# Altium PCB MAIN.PcbDoc
Units mil, origin at the board's own origin, x right, y up, seen from the top; angles counter-clockwise.
Board outline 3745 x 3010 mil, 2 copper layers (Top Layer, Bottom Layer); 47 components, 29 nets, 159 pads, 5 vias.
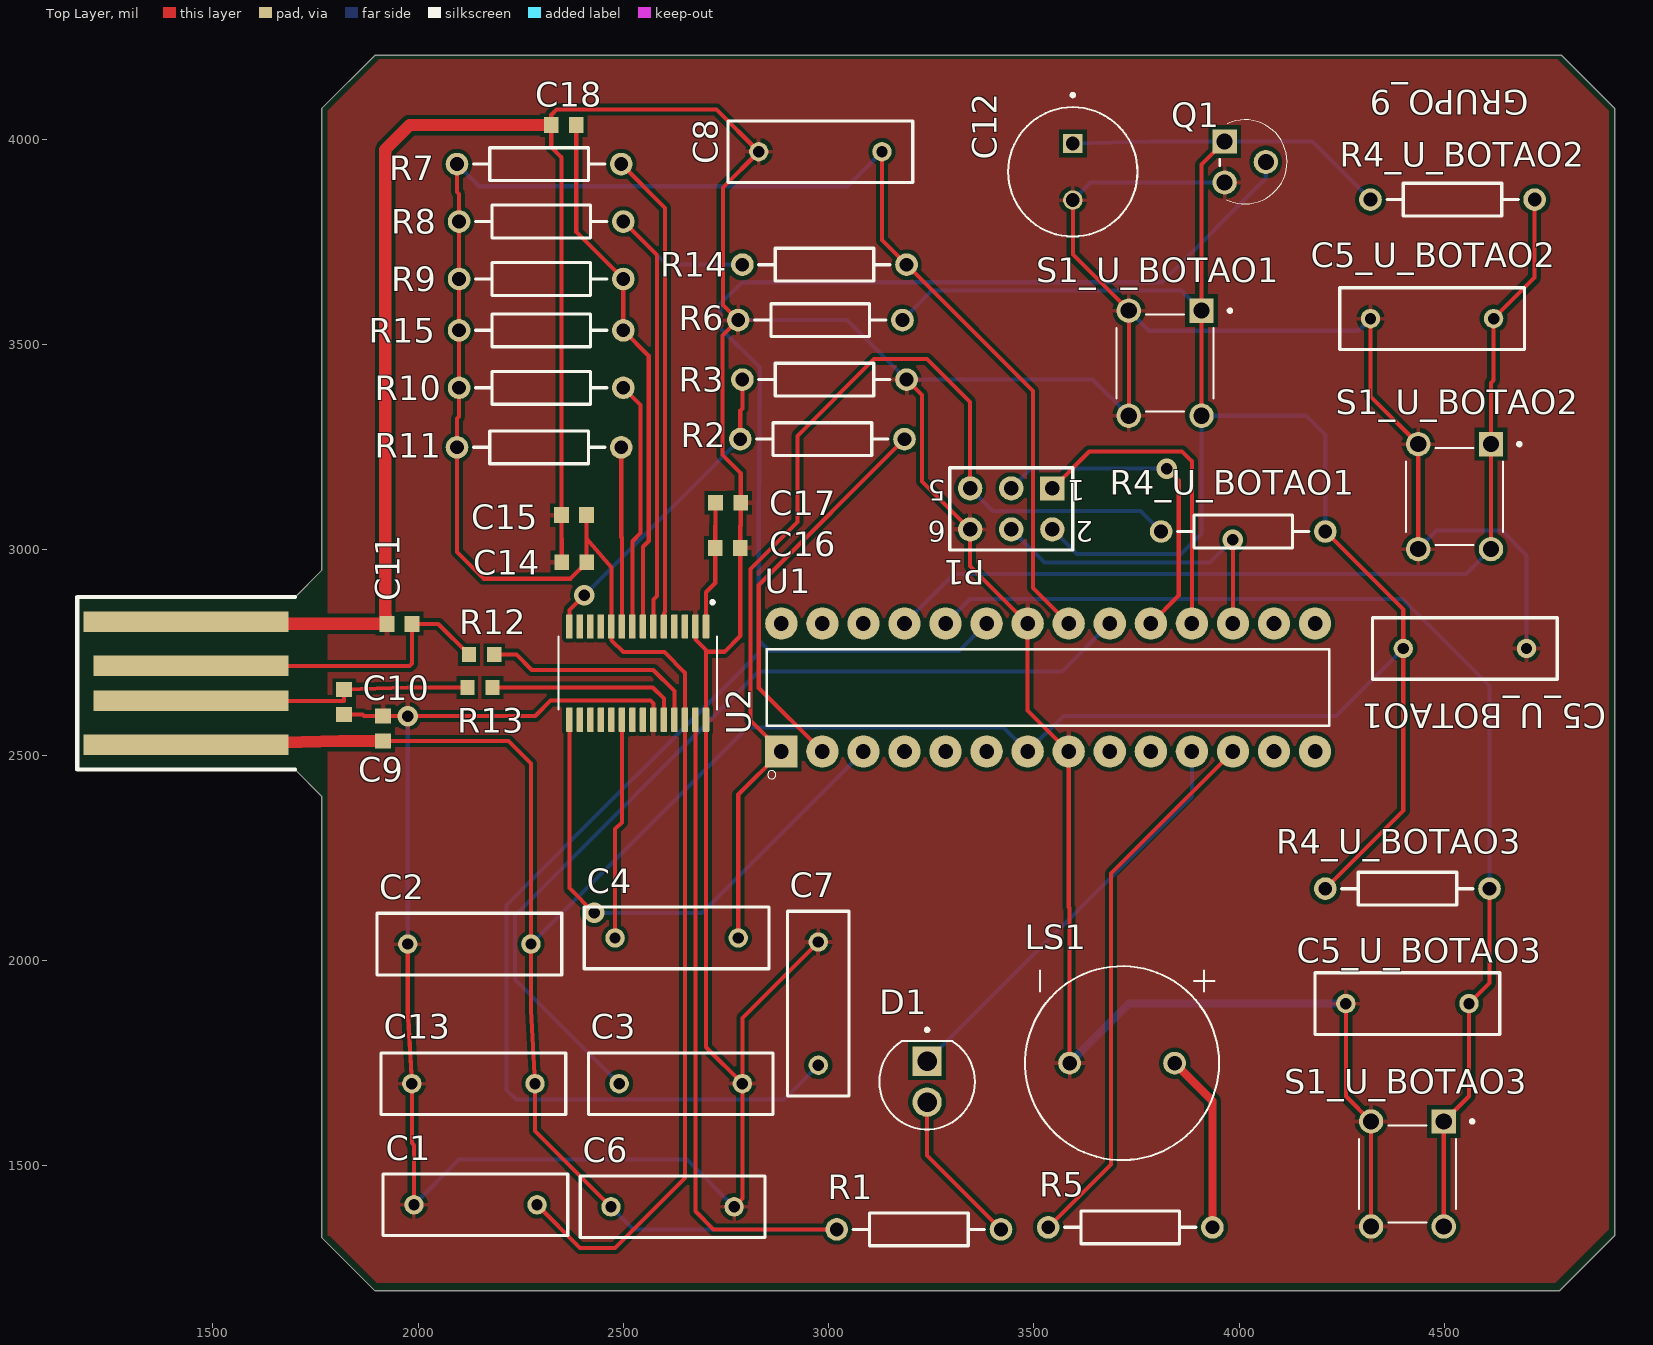
[diagram p0: Top Layer view]
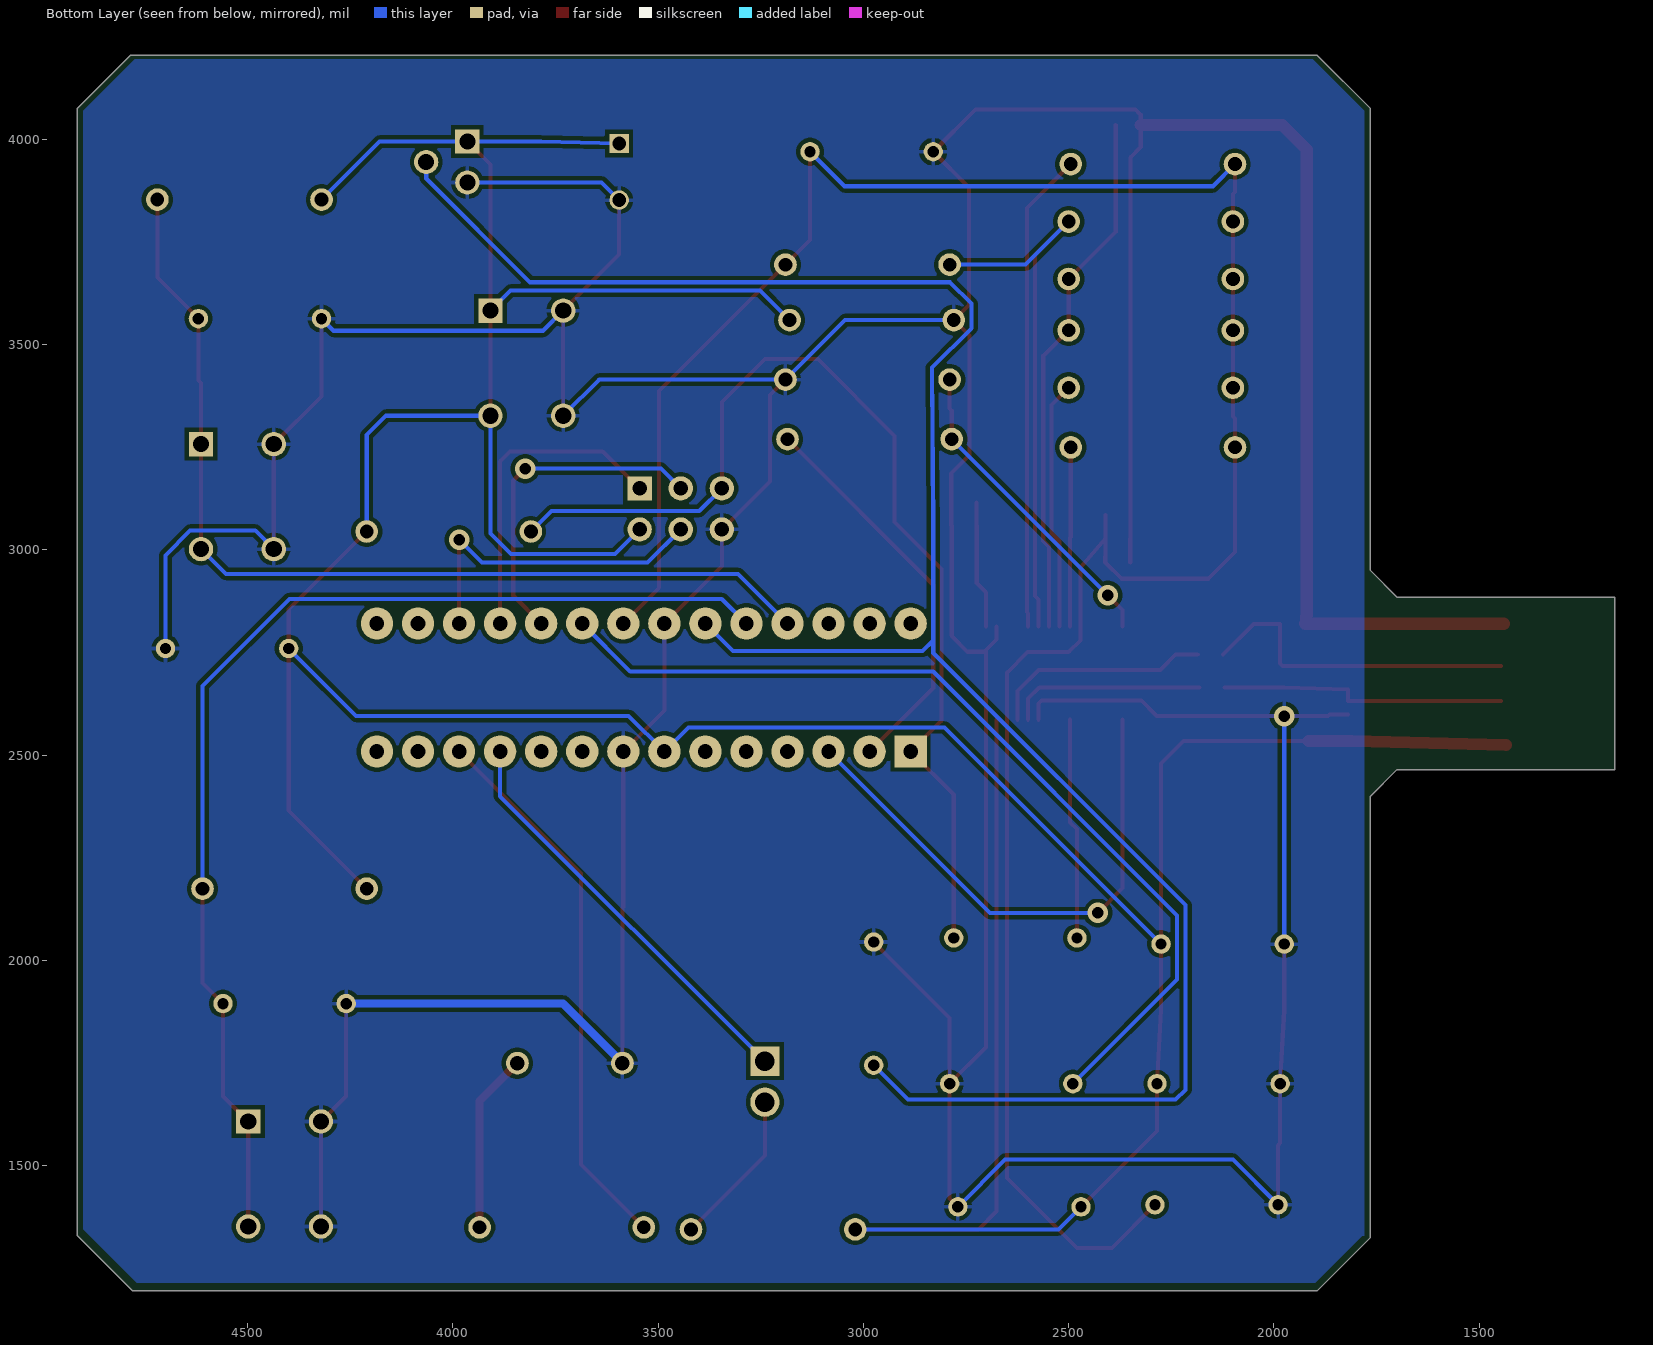
[diagram p1: Bottom Layer view, seen from below]

## Layer stack, top to bottom
Top Solder: solder mask 0.4, Solder Resist, Dk 3.5
Top Layer: signal copper 1.4
Dielectric 1: dielectric 12.6, FR-4, Dk 4.8
Bottom Layer: signal copper 1.4
Bottom Solder: solder mask 0.4, Solder Resist, Dk 3.5

## Board outline
1170,2465 1170,2885 1700,2885 1765,2950 1765,4075 1895,4205 4785,4205 4915,4075 4915,1330 4780,1195 1895,1195 1765,1325 1765,2400 1700,2465

## Design rules (kind name [scope] priority, off if disabled: settings)
Clearance [All] p1: gap=10 ignorepadtopadclearanceinfootprint=TRUE
PolygonConnect [All] p1: connectstyle=Relief reliefconductorwidth=10 reliefentries=4 polygonreliefangle="90 Angle" airgapwidth=10
RoutingVias [All] p1: holewidth=28 width=50 viastyle="Through Hole" minholewidth=28 minwidth=50 maxholewidth=28 maxwidth=50
SolderMaskExpansion [All] p1: expansion=4 istentingtop=FALSE
SupplyNets "Schematic Supply Nets_3" [InNet('VBUS_DET')] p1: voltage=0.000
SupplyNets "Schematic Supply Nets_2" [InNet('VDD_3V8')] p2: voltage=0.000
SupplyNets "Schematic Supply Nets_1" [InNet('VCC')] p3: voltage=0.000
SupplyNets "Schematic Supply Nets" [InNet('VCCIO')] p4: voltage=0.000
Width [All] p1 off: maxlimit=10 minlimit=10 preferedwidth=10
30 further rules are at their usual default settings.

## Classes and differential pairs
channel class BOTAO: U_BOTAO1 U_BOTAO2 U_BOTAO3
component class U_USB_SERIE: C8 C9 C10 C11 C12 C13 C14 C15 C16 C17 C18 R6 R7 R8 R9 R10 R11 R12 R13 R14 R15 U2
component class U_SENSOR: C6 C7 Q1
component class U_LED: D1 R1
component class U_BUZZER: LS1 R5
component class U_BOTAO3: C5_U_BOTAO3 R4_U_BOTAO3 S1_U_BOTAO3
component class U_BOTAO2: C5_U_BOTAO2 R4_U_BOTAO2 S1_U_BOTAO2
component class U_BOTAO1: C5_U_BOTAO1 R4_U_BOTAO1 S1_U_BOTAO1
component class U_ATMEGA328P: C1 C2 C3 C4 P1 U1
component class MAIN: R2 R3

## Components (designator, comment, footprint, x,y, rotation, side; value= is the part's Value field where it differs from the comment)
C1 "100nF" RAD-0.3 2140,1405 r0 top value=100pF
C2 "100nF" RAD-0.3 2125,2040 r0 top value=100pF
C3 "100nF" RAD-0.3 2640,1700 r180 top value=100pF
C4 "100nF" RAD-0.3 2630,2055 r0 top value=100pF
C5_U_BOTAO1 "100nF" RAD-0.3 4550,2760 r180 top value=100pF (schematic designator C5)
C5_U_BOTAO2 "100nF" RAD-0.3 4470,3563.46 r0 top value=100pF (schematic designator C5)
C5_U_BOTAO3 "100nF" RAD-0.3 4410,1895 r0 top value=100pF (schematic designator C5)
C6 "100nF" RAD-0.3 2620,1400 r0 top value=100pF
C7 "100nF" RAD-0.3 2975,1895 r90 top value=100pF
C8 "4.7uF" RAD-0.3 2980,3970 r0 top value=100pF
C9 "100uF" CAPC1608X90N 1915,2565 r270 top
C10 "100uF" CAPC1608X90N 1820,2629.49 r90 top
C11 "100uF" CAPC1608X90N 1955,2820 r0 top
C12 "ECA1HM101" CAPPRD350W60D800H1150 3595,3921.1 r270 top
C13 "100nF" RAD-0.3 2135,1700 r0 top value=100pF
C14 "4.7uF" CAPC1608X94N 2380.51,2970 r0 top
C15 "100uF" CAPC1608X90N 2380,3085 r0 top
C16 "4.7uF" CAPC1608X94N 2754.49,3005 r180 top
C17 "100uF" CAPC1608X90N 2755.51,3115 r180 top
C18 "4.7uF" CAPC1608X94N 2355,4035 r0 top
D1 "L08R5000Q1" LEDRD254W57D500H1070 3240,1705 r270 top
LS1 "AT-1224-TWT-5V-2-R" XDCR_AT-1224-TWT-5V-2-R 3715,1750 r270 top
P1 "Header 3X2" HDR2X3 3545,3150 r180 top
Q1 "MCP9701-E/TO" TO127P254X533-3 4065,3895 r270 top
R1 "220R" AXIAL-0.4 3220,1345 r180 top value=1K
R2 "51.5K" AXIAL-0.4 2985,3270 r0 top value=1K
R3 "100K" AXIAL-0.4 2990,3415 r180 top value=1K
R4_U_BOTAO1 "22K" AXIAL-0.4 4010,3045 r180 top value=1K (schematic designator R4)
R4_U_BOTAO2 "22K" AXIAL-0.4 4520,3853.46 r180 top value=1K (schematic designator R4)
R4_U_BOTAO3 "22K" AXIAL-0.4 4410,2175 r180 top value=1K (schematic designator R4)
R5 "10R" AXIAL-0.4 3735,1350 r180 top value=1K
R6 "5K" AXIAL-0.4 2980,3560 r180 top value=1K
R7 "10K" AXIAL-0.4 2295,3940 r0 top value=1K
R8 "10K" AXIAL-0.4 2300,3800 r0 top value=1K
R9 "4.7K" AXIAL-0.4 2300,3660 r0 top value=1K
R10 "10K" AXIAL-0.4 2300,3395 r0 top value=1K
R11 "10K" AXIAL-0.4 2295,3250 r0 top value=1K
R12 "CRGCQ0603J33R" RESC1608X55N 2155,2745 r180 top
R13 "CRGCQ0603J33R" RESC1608X55N 2150.71,2665 r180 top
R14 "10K" AXIAL-0.4 2990,3695 r0 top value=1K
R15 "4.7K" AXIAL-0.4 2300,3535 r180 top value=1K
S1_U_BOTAO1 "TS02-66-95-BK-260-LCR-D" SW_TS02-66-95-BK-260-LCR-D 3820,3455 r270 top (schematic designator S1)
S1_U_BOTAO2 "TS02-66-95-BK-260-LCR-D" SW_TS02-66-95-BK-260-LCR-D 4525,3130 r270 top (schematic designator S1)
S1_U_BOTAO3 "TS02-66-95-BK-260-LCR-D" SW_TS02-66-95-BK-260-LCR-D 4410,1480 r270 top (schematic designator S1)
U1 "ATMEGA328P-PU" DIP794W46P254L2967H457Q28B 3535,2665 r90 top
U2 "FT260S-UTSSOP28_FT260S_FTD" SOP65P640X110-28N 2535,2700 r270 top
? "USB" USB_Port_PCB 1435,2525 r90 top

## Footprints (in the part's own frame and the unit in brackets; to place one, negate y for a bottom-side part, rotate by r counter-clockwise, add the part's x,y. Pads: shape width x height; smd on the part's side, far side on the other; paste and mask are expansions set on the pad)
AXIAL-0.4 [mm] "Axial Device, Thru-Hole; 2 Leads; 0.4 in Pin Spacing"
  round 1.4 hole 0.85: 1(-5.08,0) 2(5.08,0)
  silkscreen extent -4.06,-1.02 4.06,1.02
CAPC1608X90N [mm]
  rect 0.92x0.98 smd: 1(-0.775,0) 2(0.775,0)
CAPC1608X94N [mm]
  rect 0.92x0.98 smd: 1(-0.775,0) 2(0.775,0)
CAPPRD350W60D800H1150 [mm]
  round 1.2 hole 0.85: N(1.75,0)
  rect 1.2x1.2 hole 0.85: P(-1.75,0)
  silkscreen extent -4.85,-4 4,4, body extent -4,-4 4,4, height 11.5
DIP794W46P254L2967H457Q28B [mm]
  rect 2x2 hole 0.9: 1(-3.96,16.51)
  round 2 hole 0.9: 2(-3.96,13.97) 3(-3.96,11.43) 4(-3.96,8.89) 5(-3.96,6.35) 6(-3.96,3.81) 7(-3.96,1.27) 8(-3.96,-1.27) 9(-3.96,-3.81) 10(-3.96,-6.35) 11(-3.96,-8.89) 12(-3.96,-11.43) 13(-3.96,-13.97) 14(-3.96,-16.51) 15(3.96,-16.51) 16(3.96,-13.97) 17(3.96,-11.43) 18(3.96,-8.89) 19(3.96,-6.35) 20(3.96,-3.81) 21(3.96,-1.27) 22(3.96,1.27) 23(3.96,3.81) 24(3.96,6.35) 25(3.96,8.89) 26(3.96,11.43) 27(3.96,13.97) 28(3.96,16.51)
  silkscreen extent -5.65,-17.4 2.38,17.4
HDR2X3 [mm] "Connector; Header; 3x2 Position"
  rect 1.5x1.5 hole 0.9: 1(0,0)
  round 1.5 hole 0.9: 2(0,2.54) 3(2.54,0) 4(2.54,2.54) 5(5.08,0) 6(5.08,2.54)
  silkscreen extent -1.27,-1.27 6.35,3.81
LEDRD254W57D500H1070 [mm]
  round 1.815 hole 1.21: A(1.27,0)
  rect 1.815x1.815 / inner round 1.815 / far side rect 1.815x1.815 hole 1.21: C(-1.27,0)
  silkscreen extent -3.3,-2.96 2.96,2.96, body extent -2.6,-2.95 2.95,2.95, height 9.1
RAD-0.3 [mm] "Radial Cap, Thru-Hole; 2 Leads; 0.3 in Pin Spacing"
  round 1.2 hole 0.7: 1(-3.81,0) 2(3.81,0)
  silkscreen extent -5.71,-1.91 5.71,1.91
RESC1608X55N [mm]
  rect 0.87x0.93 smd: 1(-0.78,0) 2(0.78,0)
SOP65P640X110-28N [mm]
  rrect25% 1.5x0.41 smd: 1(-2.885,4.225) 2(-2.885,3.575) 3(-2.885,2.925) 4(-2.885,2.275) 5(-2.885,1.625) 6(-2.885,0.975) 7(-2.885,0.325) 8(-2.885,-0.325) 9(-2.885,-0.975) 10(-2.885,-1.625) 11(-2.885,-2.275) 12(-2.885,-2.925) 13(-2.885,-3.575) 14(-2.885,-4.225) 15(2.885,-4.225) 16(2.885,-3.575) 17(2.885,-2.925) 18(2.885,-2.275) 19(2.885,-1.625) 20(2.885,-0.975) 21(2.885,-0.325) 22(2.885,0.325) 23(2.885,0.975) 24(2.885,1.625) 25(2.885,2.275) 26(2.885,2.925) 27(2.885,3.575) 28(2.885,4.225)
  silkscreen extent -4.48,-4.9 2.25,4.9, body extent -3.2,-4.85 3.2,4.85, height 1.2
SW_TS02-66-95-BK-260-LCR-D [mm]
  rect 1.508x1.508 / inner round 1.508 / far side rect 1.508x1.508 hole 1: 1(-3.25,2.25)
  round 1.508 hole 1: 2(3.25,2.25) 3(-3.25,-2.25) 4(3.25,-2.25)
  silkscreen extent -3.35,-3 3,4.1, body extent -3.95,-3 3.94,3, height 9.7
TO127P254X533-3 [mil]
  rect 59x59 / inner round 59 / far side rect 59x59 hole 39: 1(-100,-100)
  round 59 hole 39: 2(-50,0) 3(0,-100)
  silkscreen extent -153,-112 52,52, body extent -95,-53 95,93, height 210
USB_Port_PCB [mil] "USB_A_MALE"
  rect 50x500 smd: 1(0,0) 4(300,0)
  rect 50x475 smd: 2(107.5,-12.5) 3(192.5,-12.5)
  silkscreen extent -60,-265 360,265
XDCR_AT-1224-TWT-5V-2-R [mm]
  round 1.408 hole 0.9: N(0,-3.25) P(0,3.25)
  silkscreen extent -6,-6 6,6

## Part data
C1 C2 C3 C4 C5_U_BOTAO1 C5_U_BOTAO2 C5_U_BOTAO3 C6 C7 C8 C13: library part Cap, "Capacitor", LatestRevisionDate=17-Jul-2002, LatestRevisionNote="Re-released for DXP Platform.", PackageDescription="Radial Cap, Thru-Hole; 2 Leads; 0.3 in Pin Spacing", PackageReference=RAD-0.3, Published=8-Jun-2000, Publisher="Altium Limited"
C9 C10 C11 C15 C17: library part 06033C103KAT2A, "Cap Ceramic 0.01uF 25V X7R 10% Pad SMD 0603 125C T/R", Package=None, Availability=Unavailable, MP=06033C103KAT2A, Price=None
C12: "100ÂµF 50V Aluminum Electrolytic Capacitors Radial, Can 2000 Hrs @ 85Â°C", Package="RADIAL-2 Panasonic", Availability="No availability data", Check_prices=https://www.snapeda.com/parts/ECA1HM101/Panasonic/view-part/4478734/?ref=eda, MF=Panasonic, MP=ECA1HM101, Price=None, SnapEDA_Link=https://www.snapeda.com/parts/ECA1HM101/Panasonic/view-part/4478734/?ref=snap
C14 C16 C18: library part 06036D475KAT4A, "Cap Ceramic 4.7uF 6.3V X5R 10% SMD 0603 85Â°C Paper T/R", Package=None, Availability=Unavailable, MP=06036D475KAT4A, Price=None
D1: "LED, 5MM, ORANGE; LED / Lamp Size: 5mm / T-1 3/4; LED Colour: Orange; Typ Luminous Intensity: 4.3mcd; Viewing Angle: ...", Package=None, Availability="In Stock", Check_prices=https://www.snapeda.com/parts/L08R5000Q1/LED+Technology/view-part/?ref=eda, MF="LED Technology", MP=L08R5000Q1, Price=None, SnapEDA_Link=https://www.snapeda.com/parts/L08R5000Q1/LED+Technology/view-part/?ref=snap
LS1: "AUDIO TRANSDUCER 12 VP-P 85 DB 2400 HZ", Package=None, Availability=Unavailable, MP=AT-1224-TWT-5V-2-R, Price=None
P1: "Header, 3-Pin, Dual row", LatestRevisionDate=17-Jul-2002, LatestRevisionNote="Re-released for DXP Platform.", Publisher="Altium Limited"
Q1: "3 TO-92 4x4mm BAG, Linear Active Thermister (TM) IC (19.53mV/oC)", Package="TO-92 Microchip", Check_prices=https://www.snapeda.com/parts/MCP9701-E/TO/Microchip/view-part/?ref=eda, MF="Microchip Technology", MP=MCP9701-E/TO, SnapEDA_Link=https://www.snapeda.com/parts/MCP9701-E/TO/Microchip/view-part/?ref=snap
R1 R2 R3 R4_U_BOTAO1 R4_U_BOTAO2 R4_U_BOTAO3 R5 R6 R7 R8 R9 R10 R11 R14 R15: library part Res2, "Resistor", LatestRevisionDate=17-Jul-2002, LatestRevisionNote="Re-released for DXP Platform.", PackageDescription="Axial Device, Thru-Hole; 2 Leads; 0.4 in Pin Spacing", PackageReference=AXIAL-0.4, Published=8-Jun-2000, Publisher="Altium Limited"
R12 R13: "Fixed Resistor CRGCQ 0603 33R 5%", Package=None, Availability=Unavailable, MP=CRGCQ0603J33R, Price=None
S1_U_BOTAO1 S1_U_BOTAO2 S1_U_BOTAO3: Package=None, Availability=Unavailable, MP=TS02-66-95-BK-260-LCR-D, Price=None
U1: "ATmega Series 20 MHz 32 KB Flash 2 KB SRAM 8-Bit Microcontroller - DIP-28", Package=None, Availability=Unavailable, MP=ATMEGA328P-PU, Price=None
U2: Manufacturer_Part_Number=FT260S-U, Mfr_Name="FTDI, Future Technology Devices International Ltd", Package=TSSOP28_FT260S_FTD, Copyright="Copyright (C) 2024 Ultra Librarian. All rights reserved.", DeviceName=TSSOP28_FT260S_FTD, DeviceSetName=FT260S-U, GateName_1=A, LibraryName=2024-10-31_11-49-55_Library, SymbolName_1=FT260S-U

## Via types
v1: diameter 50, hole 28, Top Layer to Bottom Layer, 5 vias

## Nets (pads, with @x,y where several pads share a name; then routed paths per layer and width w, separated by ;. In a path a pad name is that pad's centre, name@x,y a point inside that pad or via, vN(x,y) a via of type N, cw(c..) or ccw(c..) an arc to the next point about the centre after c; other vN are vias at no path point)
DEBUGGER: R7.2 U2.5 | length 1172
  Top Layer w10: R7.2 2602,3833 2602,2849 2598.98,2845.98 U2.5
DM: R13.1 U2.24 | length 480.2
  Top Layer w10: R13.1 2571.79,2665 2598.98,2637.82 U2.24
DP: R12.1 U2.25 | length 545.6
  Top Layer w10: R12.1 2240,2745 2277,2708 2573,2708 2624.57,2656.43 U2.25
MISO: P1.1 U1.18 | length 782.3
  Top Layer w10: P1.1 3635,3240 3861,3240 3885,3216 U1.18
MOSI: P1.4 U1.17 | length 800.8
  Top Layer w10: U1.17 v1(3985,3025)
  Bottom Layer w10: P1.4 3526,2969 3929,2969 v1(3985,3025)
Net_2: ?.2 C10.2 R13.2 | length 700.1
  Top Layer w10: ?.2 1820,2632.5 C10.2 1975,2665 R13.2
Net_3: ?.3 C11.2 R12.2 | length 806.9
  Top Layer w10: ?.3 1979.65,2717.5 1985.51,2723.36 C11.2 2049.29,2820 R12.2
NetC3_2: C3.2 U1.20 | length 2258.7
  Bottom Layer w10: C3.2 2236,1954 2236,2110 2830,2704 3568.09,2704 U1.20
NetC4_1: C4.1 U2.20 | length 538.3
  Top Layer w10: C4.1 2480,2320 2496.61,2336.61 U2.20
NetC5_U_BOTAO2_2: C5_U_BOTAO2.2 R4_U_BOTAO2.1 S1_U_BOTAO2.1 S1_U_BOTAO2.2 U1.25 | length 2399.1
  Top Layer w10: S1_U_BOTAO2.2 S1_U_BOTAO2.1 4613.58,3407 4620,3413.42 C5_U_BOTAO2.2 4720,3663.46 R4_U_BOTAO2.1
  Bottom Layer w10: U1.25 3305.09,2941 4552.53,2941 S1_U_BOTAO2.2
NetC5_U_BOTAO3_2: C5_U_BOTAO3.2 R4_U_BOTAO3.1 S1_U_BOTAO3.1 S1_U_BOTAO3.2 U1.24 | length 2800.8
  Top Layer w10: S1_U_BOTAO3.2 S1_U_BOTAO3.1 4560,1669.37 C5_U_BOTAO3.2 4610,1945 R4_U_BOTAO3.1
  Bottom Layer w10: U1.24 3345.09,2881 4398,2881 4610,2669 R4_U_BOTAO3.1
NetC7_1: C7.1 Q1.2 U1.23 | length 5100.7
  Bottom Layer w10: C7.1 2891,1661 2240,1661 2216,1685 2216,2135 2830,2749 2830,2780 ; U1.23 3318.09,2754 2856,2754 2830,2780 ; Q1.2 4065,3905 3812,3652 2789,3652 2737,3600 2737,3540 2833,3444 2830,3059 2830,2780
NetD1_A: D1.A R1.1 | length 384.6
  Top Layer w10: D1.A 3240,1525 R1.1
NetD1_C: D1.C U1.11 | length 1021.3
  Bottom Layer w10: D1.C 3885,2400 U1.11
NetLS1_P: LS1.P R5.1 | length 438.1
  Top Layer w20: LS1.P 3935,1657.95 R5.1
NetR2_1: R2.1 R3.2 U2.14 | length 775.9
  Top Layer w10: U2.14 2368.66,2853.66 v1(2405,2890) ; R2.1 2785,3340 2790,3345 R3.2
  Bottom Layer w10: v1(2405,2890) R2.1
NetR2_2: R2.2 U1.2 | length 972.2
  Top Layer w10: U1.2 2830,2664.09 2830,2915 R2.2
NetR5_2: R5.2 U1.12 | length 1345.5
  Top Layer w10: R5.2 3688,1503 3688,2212.09 U1.12
NetR10_2: R10.2 U2.8 | length 607
  Top Layer w10: R10.2 2542,3353 2542,3041 2522.2,3021.2 U2.8
NetR11_2: R11.2 U2.9 | length 437.1
  Top Layer w10: R11.2 2495,3031.61 2496.61,3030 U2.9
NetU1_3: U1.3 U2.15 | length 1314.2
  Top Layer w10: U2.15 2368.66,2176.34 v1(2429,2116)
  Bottom Layer w10: v1(2429,2116) 2691.91,2116 U1.3
RESET: C4.2 P1.5 R4_U_BOTAO1.2 U1.1 | length 2605.2
  Top Layer w10: C4.2 2780,2404.09 U1.1 2810,2584.09 2810,2954 2924,3068 2924,3278 3111,3465 3240,3465 3345,3360 P1.5
  Bottom Layer w10: P1.5 3400,3095 3760,3095 R4_U_BOTAO1.2
RESETN: C18.2 R9.2 R15.1 U2.7 | length 1300.4
  Top Layer w10: C18.2 2385.51,3774.49 R9.2 R15.1 2562,3473 2562,3022 2547.8,3007.8 U2.7
SCK: P1.3 U1.19 | length 816.2
  Top Layer w10: U1.19 3853,2888.91 3853,3169 v1(3824,3198)
  Bottom Layer w10: P1.3 3493,3198 v1(3824,3198)
STEST_RESTN: R8.2 R14.1 U2.6 | length 1357.4
  Top Layer w10: R8.2 2582,3718 2582,2888 2573.39,2879.39 U2.6
  Bottom Layer w10: R8.2 2605,3695 R14.1
VBUS_DET: ?.4 C1.1 C2.1 C3.1 C5_U_BOTAO1.1 C5_U_BOTAO2.1 C5_U_BOTAO3.1 C6.2 C7.2 C8.1 C9.1 C10.1 C11.1 C12.N C13.1 C14.1 C15.1 C16.1 C17.1 C18.1 LS1.N P1.6 Q1.3 R3.1 R6.2 S1_U_BOTAO1.3 S1_U_BOTAO1.4 S1_U_BOTAO2.3 S1_U_BOTAO2.4 S1_U_BOTAO3.3 S1_U_BOTAO3.4 U1.8 U1.22 U2.2 U2.23 U2.28 | length 16774.9
  Top Layer w10: ?.4 ?.4@1440,2820 ; C10.1 1865,2598.98 1868.46,2595.51 C9.1 v1(1975,2595.51) 2285.51,2595.51 2323,2633 2566,2633 2573.39,2625.61 U2.23 ; C2.1 1975,1880 C13.1 1985,1555 1990,1550 C1.1 ; C14.1 2350,3027 2349.49,3027.51 C15.1 2349.49,3956.51 2324.49,3981.51 C18.1 2324.49,4060 2337.49,4073 2727,4073 C8.1 2743,3883 2743,3597 R6.2 2742,3522 2742,3231.02 2786.02,3187 C17.1 2786.02,3060.02 2785,3059 C16.1 2785,2791 2746,2752 2705.29,2752 2701.34,2755.95 ; U2.2 2675.75,2781.54 2701.34,2755.95 ; C6.2 2790,1420 C3.1 ; C7.2 2790,1860 C3.1 ; R3.1 3228,3377 3228,3167 P1.6 3345,2960.91 U1.22 3485,2609.09 U1.8 3585,2130.05 3587.05,2128 LS1.N ; C12.N 3595,3719.37 S1_U_BOTAO1.3 S1_U_BOTAO1.4 ; C5_U_BOTAO3.1 4260,1669.37 S1_U_BOTAO3.3 S1_U_BOTAO3.4 ; C5_U_BOTAO2.1 4320,3374.37 S1_U_BOTAO2.3 S1_U_BOTAO2.4 ; 2701.34,2755.95 U2.28 2701.34,1788.66 C3.1
  Top Layer w30: ?.4@1440,2820 C11.1 ; C11.1@1921.38,2824.29 1921.38,2839.3 1920,2840.68 1920,3975 1980,4035 C18.1
  Bottom Layer w10: C2.1 v1(1975,2595.51) ; C1.1 2100,1515 2655,1515 C6.2 ; R6.2 3045,3560 R3.1 3643.46,3415 S1_U_BOTAO1.4 ; C12.N 3637.8,3895 Q1.3 ; S1_U_BOTAO1.3 3780.37,3534 4290.54,3534 C5_U_BOTAO2.1 ; S1_U_BOTAO2.4 4481.37,3047 4640,3047 4700,2987 C5_U_BOTAO1.1
  Bottom Layer w20: LS1.N 3732.05,1895 C5_U_BOTAO3.1
VCC: ?.1 C2.2 C5_U_BOTAO1.2 C6.1 C9.2 C12.P C13.2 P1.2 Q1.1 R1.2 R4_U_BOTAO1.1 R4_U_BOTAO2.2 R4_U_BOTAO3.2 R6.1 S1_U_BOTAO1.1 S1_U_BOTAO1.2 U1.7 U2.27 | length 11157.4
  Top Layer w10: C9.2 2220.51,2534.49 2275,2480 C2.2 2275,1880 C13.2 2285,1585 C6.1 ; U2.27 2675.75,1389.25 2720,1345 R1.2 ; S1_U_BOTAO1.2 S1_U_BOTAO1.1 3908.58,3938.58 Q1.1 ; R4_U_BOTAO3.2 4400,2365 C5_U_BOTAO1.2 4400,2855 R4_U_BOTAO1.1
  Top Layer w30: ?.1 1809.74,2534.49 C9.2
  Bottom Layer w10: C2.2 2803,2568 3426.09,2568 U1.7 3571.91,2596 4236,2596 C5_U_BOTAO1.2 ; C6.1 2525,1345 R1.2 ; R6.1 3252,3632 3859.54,3632 S1_U_BOTAO1.1 ; P1.2 3605,2990 3858.58,2990 3908.58,3040 S1_U_BOTAO1.2 4162.95,3327.05 4210,3280 R4_U_BOTAO1.1 ; C12.P 3785,3995 Q1.1 4178.46,3995 R4_U_BOTAO2.2
VCCIO: C1.2 C8.2 C14.2 C15.2 R7.1 R8.1 R9.1 R10.1 R11.1 R14.2 R15.2 U1.21 U2.10 U2.26 | length 6040.1
  Top Layer w10: R7.1 2095,3872 2100,3867 R8.1 R9.1 R15.2 R10.1 2100,3325 2095,3320 R11.1 2095,2995 2160,2930 2371.02,2930 C14.2 2410.51,3000.51 2410.51,3027.51 ; C1.2 2395,1300 2480,1300 2650.16,1470.16 U2.26 2650.16,2700.84 2600,2751 2500,2751 2471.02,2779.98 U2.10 2471.02,2957 2410.51,3027.51 ; C15.2 2410.51,3027.51 ; C8.2 3130,3755 R14.2 3498,3387 3498,2907.91 U1.21
  Bottom Layer w10: R7.1 2149,3886 3046,3886 C8.2
VDD_3V8: C16.2 C17.2 U2.1 | length 311.2
  Top Layer w10: U2.1 2701.34,2897 2723.98,2919.64 C16.2 2723.98,3059 2725,3060.02 C17.2
pads on no net: U1.4 U1.5 U1.6 U1.9 U1.10 U1.13 U1.14 U1.15 U1.16 U1.26 U1.27 U1.28 U2.3 U2.4 U2.11 U2.12 U2.13 U2.16 U2.17 U2.18 U2.19 U2.21 U2.22

## Polygon pours and split planes (outlines as drawn)
VBUS_DET on Top Layer "VBUS_DET_L01_P001" (solid, remove dead copper, pour order 1): 1780,4070 1905,4195 4775,4195 4900,4070 4900,1345 4770,1215 1900,1215 1785,1330 1780,1330
VBUS_DET on Bottom Layer "VBUS_DET_L02_P002" (solid, pour order 2): 1780,4070 1905,4195 4775,4195 4900,4070 4900,1345 4770,1215 1900,1215 1785,1330 1780,1330

## Silkscreen, mask and mechanical layers (free items; w line width, h text height)
Top Overlay:
  text "GRUPO_9" at 4705,4120 h60 r180

## Text inside footprints (layer, text, board x,y; h text height)
P1: Top Overlay "1" at 3625,3170 h50 r180; Top Overlay "2" at 3645,3070 h50 r180; Top Overlay "5" at 3285,3170 h50 r180; Top Overlay "6" at 3285,3070 h50 r180